# Altium PCB h_sensor_safety.PcbDoc
Units mil, origin at the board's own origin, x right, y up, seen from the top; angles counter-clockwise.
Board outline 2850 x 1885 mil, 2 copper layers (Top Layer, Bottom Layer); 19 components, 33 nets, 76 pads, 6 vias.
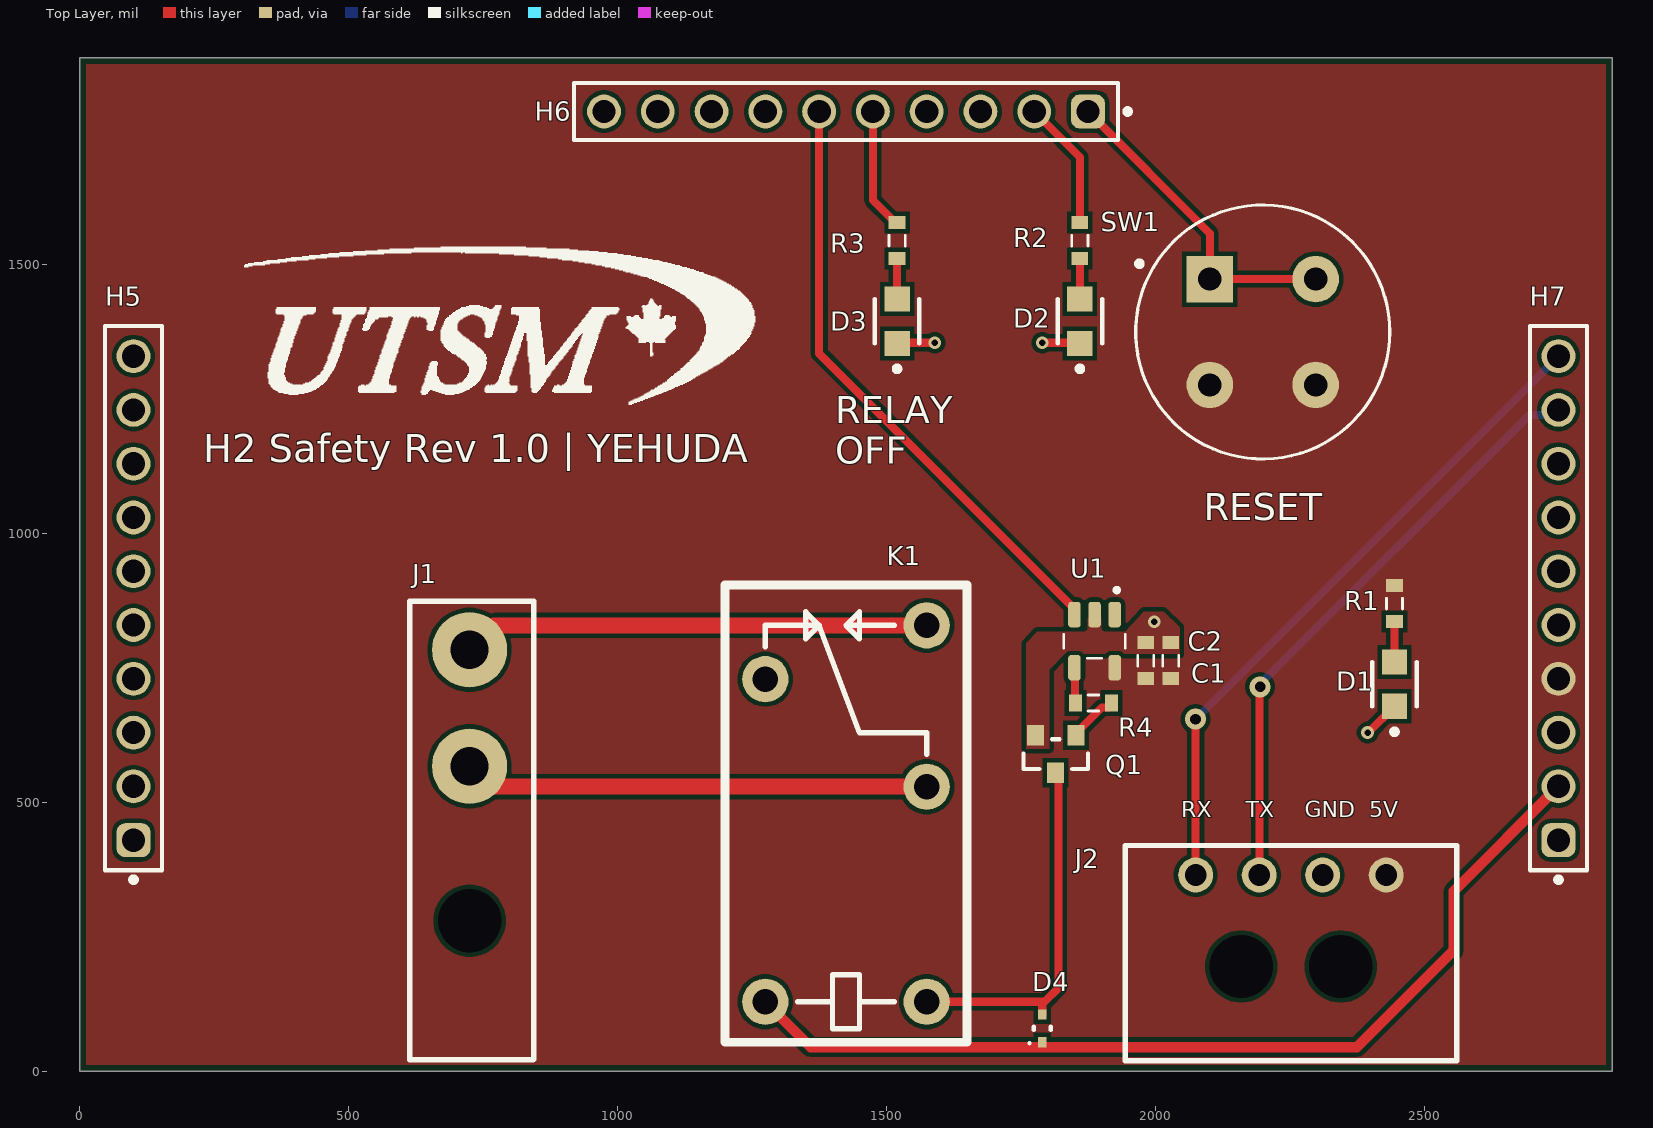
[diagram p0: Top Layer view]
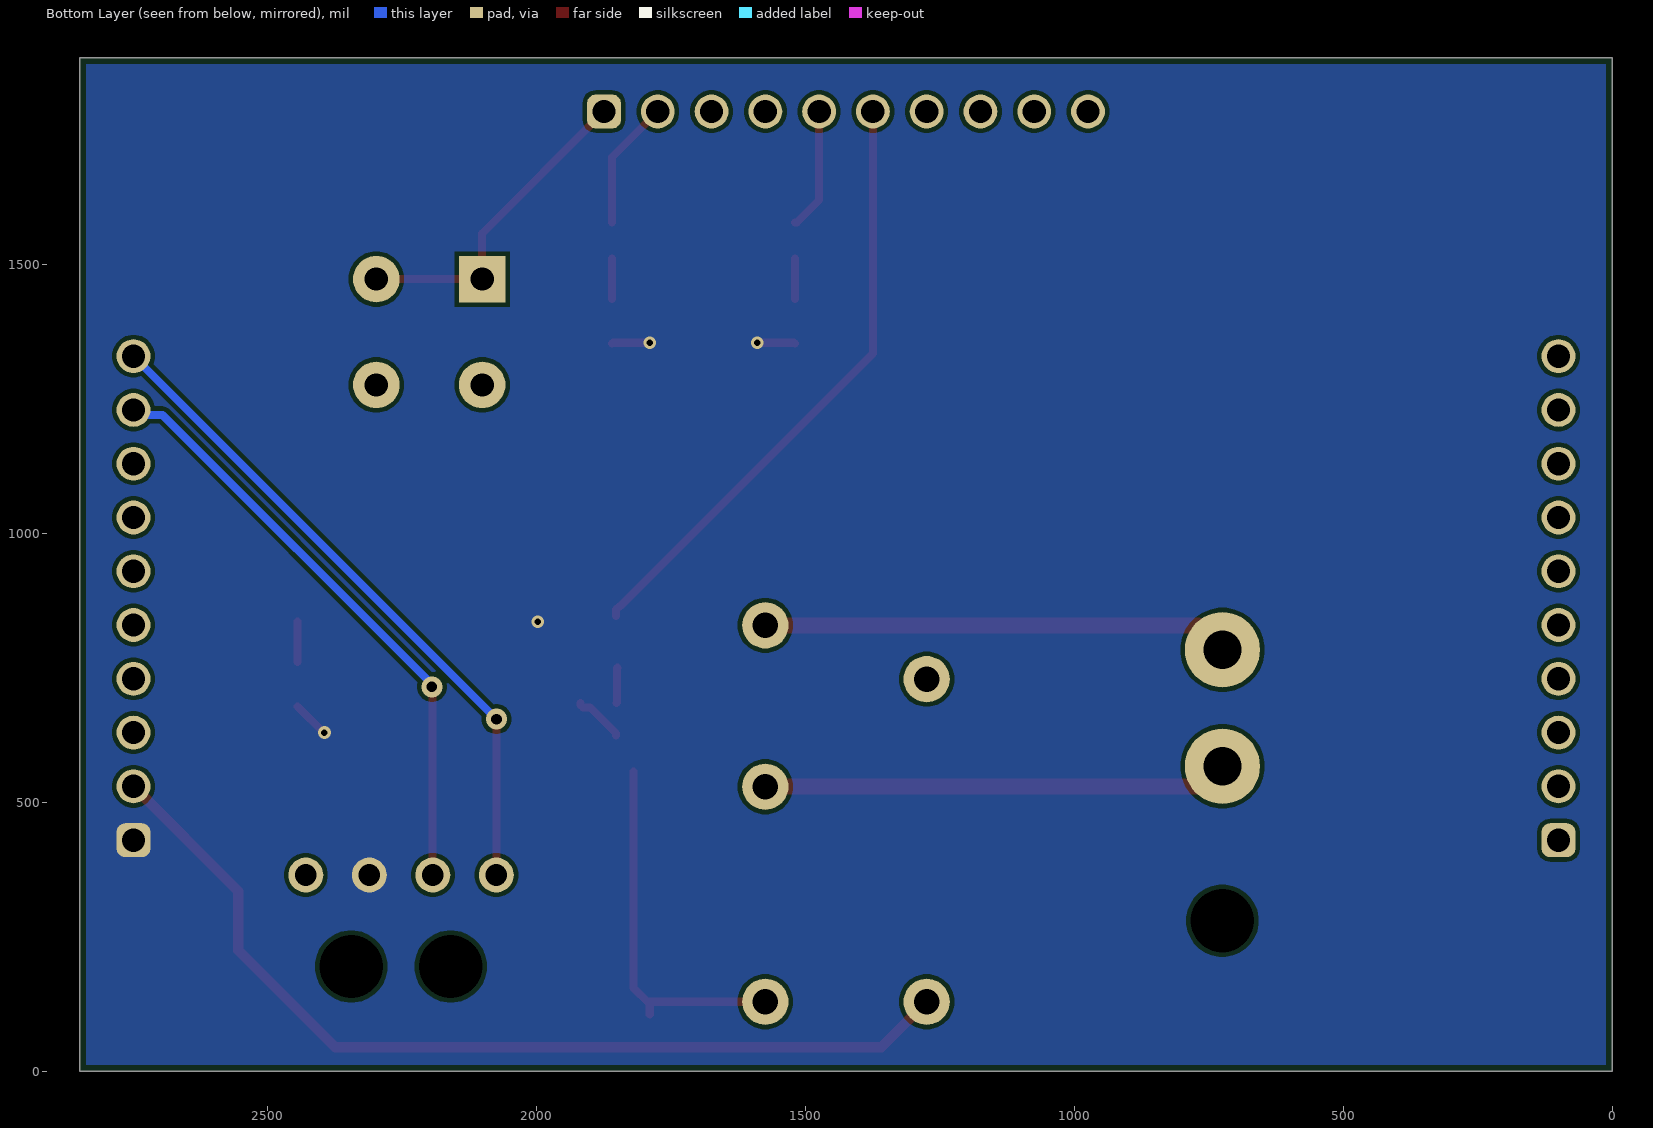
[diagram p1: Bottom Layer view, seen from below]
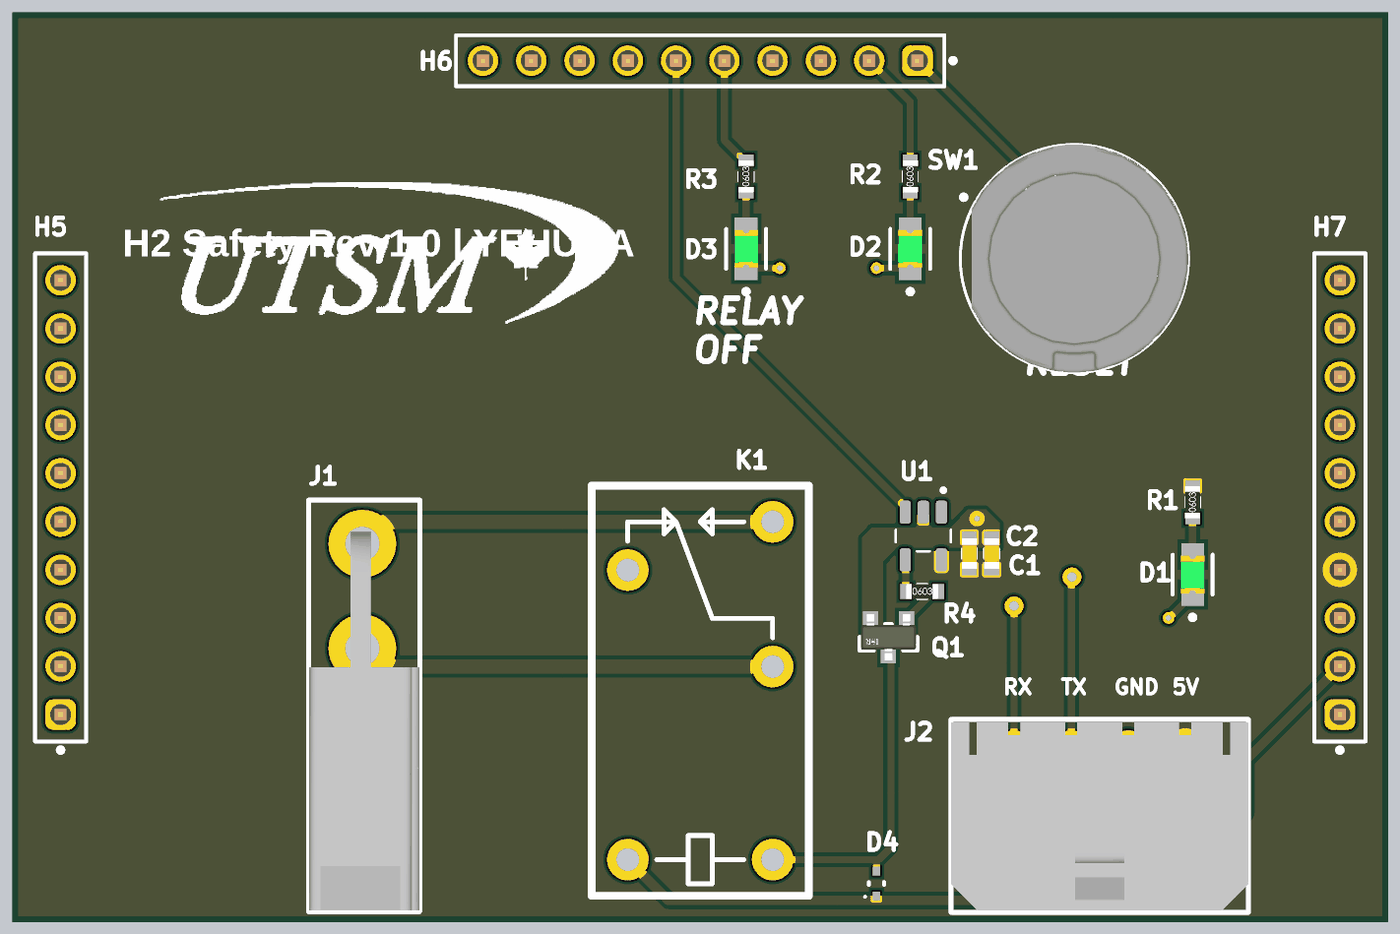
[diagram p2: 3D render of the assembled board from above, using the file's embedded part models]

## Layer stack, top to bottom
Top Solder: solder mask 0.4, Solder Resist, Dk 3.5
Top Layer: signal copper 1.4
Dielectric 1: dielectric 12.6, FR-4, Dk 4.8
Bottom Layer: signal copper 1.4
Bottom Solder: solder mask 0.4, Solder Resist, Dk 3.5

## Board outline
0,0 2850,0 2850,1885 0,1885

## Design rules (kind name [scope] priority, off if disabled: settings)
BoardOutlineClearance [All] p1: gap=11.81 ignorepadtopadclearanceinfootprint=FALSE except(15.75: Arc-SplitBarrior Arc-SplitContinuation Track-SplitBarrior Track-SplitContinuation SMDPad-SplitBarrior SMDPad-SplitContinuation THPad-SplitBarrior THPad-SplitContinuation Via-SplitBarrior Via-SplitContinuation Fill-SplitBarrior Fill-SplitContinuation Poly-SplitBarrior Poly-SplitContinuation Region-SplitBarrior Region-SplitContinuation Text-SplitBarrior Text-SplitContinuation)
Clearance "Clearance Different Nets" [All] p1: gap=7.87 ignorepadtopadclearanceinfootprint=FALSE except(3.5: Arc-Arc Arc-Track Arc-SMDPad Track-Track Track-SMDPad; 5: SMDPad-SMDPad SMDPad-Via THPad-Via Via-Via; 10: Arc-Via Arc-Text Track-Via Track-Text SMDPad-Text THPad-Text Via-Text Fill-Text Poly-Text Region-Text Text-Text; 19.68: THPad-THPad Via-Hole)
Clearance "Clearance Same Nets" [All] p2: gap=7.87 ignorepadtopadclearanceinfootprint=FALSE except(3.5: Arc-Arc Arc-Track Arc-SMDPad Track-Track Track-SMDPad SMDPad-SMDPad; 5: SMDPad-Via THPad-Via; 10: Arc-Via Arc-Text Track-Via Track-Text SMDPad-Text THPad-Text Via-Via Via-Text Fill-Text Poly-Text Region-Text Text-Text)
Clearance "Clearance Bottom Layer" [OnLayer('Bottom Layer')] p3: gap=8 ignorepadtopadclearanceinfootprint=TRUE except(10: Arc-Text Track-Text SMDPad-Text THPad-Text Via-Text Fill-Text Poly-Text Region-Text Text-Text)
Clearance "Clearance Top Layer" [OnLayer('Top Layer')] p4: gap=8 ignorepadtopadclearanceinfootprint=TRUE except(10: Arc-Text Track-Text SMDPad-Text THPad-Text Via-Text Fill-Text Poly-Text Region-Text Text-Text)
HoleSize [All] p1: absolutevalues=TRUE maxlimit=248.03 minlimit=7.87 maxpercent=80.000 minpercent=20.000
MinimumAnnularRing [All] p1: minimumring=5.12
MinimumSolderMaskSliver [All] p1: minsoldermaskwidth=3.94
PolygonConnect PolygonConnect_1 [All] p1: connectstyle=Direct reliefconductorwidth=20 reliefentries=4 polygonreliefangle="90 Angle" airgapwidth=10
RoutingCorners [All] p1: cornerstyle=Round minsetback=100 maxsetback=100
RoutingVias [All] p1: holewidth=19.68 width=39.37 viastyle="Through Hole" minholewidth=7.87 minwidth=13.78 maxholewidth=39.37 maxwidth=78.74
SilkToSilkClearance [All] p1: silktosilkclearance=3.94
SilkToSolderMaskClearance [IsPad] p1: minsilkscreentomaskgap=3.94 clearancetoexposedcopper=TRUE
SolderMaskExpansion [All] p1: expansion=4 istentingtop=FALSE
SupplyNets "Schematic Supply Nets_2" [InNet('+12')] p1: voltage=0.000
SupplyNets "Schematic Supply Nets_1" [InNet('GND')] p2: voltage=0.000
SupplyNets "Schematic Supply Nets" [InNet('+5')] p3: voltage=0.000
Width [All] p1: maxlimit=100 minlimit=3.5 preferedwidth=15
25 further rules are at their usual default settings.

## Components (designator, comment, footprint, x,y, rotation, side; value= is the part's Value field where it differs from the comment)
C1 "" 0603c 1982.55,763.76 r270 top value=1uF
C2 "" 0603c 2028.78,763.76 r270 top value=0.1uF
D1 "LTST-C171GKT" FP-LTST-C171GKT-MFG 2445,720 r90 top
D2 "LTST-C171GKT" FP-LTST-C171GKT-MFG 1860,1395 r90 top
D3 "LTST-C171GKT" FP-LTST-C171GKT-MFG 1520,1395 r90 top
D4 "RB521S30T1G" ONSC-SOD-523-2-502-01_V 1790,80 r90 top
H5 "" 61301011121 100,880 r90 top
H6 "" 61301011121 1425,1785 r180 top
H7 "" 61301011121 2750,880 r90 top
J1 "header 2 pos minifit right angle" "0039300020 minifit 2 pos" 725,567.4 r0 top
J2 "header 4 pos microfit right angle single row" "0436500401 MICROFIT 4 POS RIGHT ANGLE SINGLE ROW" 2252.48,195 r0 top
K1 "G5Q-1A4-DC12" G5Q-1A4-DC12 1575,129.4 r90 top
Q1 "IRLML6344TRPBF" FP-Micro3-MFG 1815,590 r270 top
R1 "Res3" 0603r 2445,870 r90 top value=300
R2 "Res3" 0603r 1860,1545 r90 top value=300
R3 "Res3" 0603r 1520,1545 r90 top value=300
R4 "Res3" 0603r 1885,685 r0 top value=10k
SW1 "D6R10F1LFS" FP-D6R10F1LFS-MFG 2200,1375 r0 top
U1 "UCC27519DBVR" SOT95P280X145-5N 1887.2,800 r270 top

## Footprints (in the part's own frame and the unit in brackets; to place one, negate y for a bottom-side part, rotate by r counter-clockwise, add the part's x,y. Pads: shape width x height; smd on the part's side, far side on the other; paste and mask are expansions set on the pad)
0603c [mil]
  rect 24x31 smd: 1(-33.5,0) 2(33.5,0)
  silkscreen extent -10,-15 10,15, body extent -31,-15 31,16, height 31
0603r [mil]
  rect 24x31 smd: 1(-33.5,0) 2(33.5,0)
  silkscreen extent -10,-15 10,15, body extent -33,-16 33,16, height 22
"0039300020 minifit 2 pos" [mil]
  round 80 hole 118.11 unplated: 0(0,-287.4)
  round 140 hole 71: 1(0,0) 2(0,216.54)
  silkscreen extent -111,-546 119,307, body extent -110,-543 118,241, height 449
"0436500401 MICROFIT 4 POS RIGHT ANGLE SINGLE ROW" [mm]
  round 2.54 hole 2.997 unplated: 0(-2.35,0) 0(2.35,0)
  round 1.651 hole 1.02: 1(1.5,4.32) 2(4.5,4.32) 3(-1.5,4.32) 4(-4.5,4.32)
  silkscreen extent -7.82,-4.44 7.83,5.71, body extent -7.82,-4.34 7.82,5.56, height 6.13
61301011121 [mm] "Pin Header, pitch 2.54 mm, THT, Vertical, single row, 10p"
  rrect50% 1.6x1.6 hole 1.1: 1(-11.43,0)
  round 1.6 hole 1.1: 2(-8.89,0) 3(-6.35,0) 4(-3.81,0) 5(-1.27,0) 6(1.27,0) 7(3.81,0) 8(6.35,0) 9(8.89,0) 10(11.43,0)
  silkscreen extent -13.42,-1.34 12.85,1.34, body extent -12.7,-1.27 12.7,1.27, height 8.57
FP-D6R10F1LFS-MFG [mm]
  rect 2.2x2.2 hole 1.1 paste-2539.97 mask+0: 1(-2.5,2.5)
  round 2.2 hole 1.1 paste-2539.97 mask+0: 2(2.5,2.5) 3(-2.5,-2.5) 4(2.5,-2.5)
  silkscreen extent -6,-6 6,6, body extent -6.1,-6.1 6.1,6.1, height 0.25
FP-LTST-C171GKT-MFG [mm]
  rect 1.2x1.2 smd paste+0 mask+0: 1(-1.05,0) 2(1.05,0)
  silkscreen extent -2.37,-1.05 1.05,1.05, body extent -1.75,-0.77 1.75,0.77, height 0.25
FP-Micro3-MFG [mm]
  rect 0.972x0.802 smd paste+0 mask+0: 1(-0.885,0.95) 2(-0.885,-0.95) 3(0.885,0)
  silkscreen extent -0.7,-1.52 0.7,1.52, body extent -1.47,-1.87 1.47,1.87, height 0.25
G5Q-1A4-DC12 [mil]
  round 86 hole 47.24: P1(0,0) P2(400,0) P3(700,0) P4(600,300) P5(0,300)
  silkscreen extent -75,-75 775,375
ONSC-SOD-523-2-502-01_V [mm] "SOD, 2-Leads, Body 1.2x0.8mm"
  rect 0.48x0.4 smd: 1(-0.66,0) 2(0.66,0)
  silkscreen extent -0.75,-0.4 0.07,0.65, body extent -0.6,-0.4 0.6,0.4, height 0.7
SOT95P280X145-5N [mm]
  rrect50% 1.21x0.59 smd: 1(-1.255,0.95) 2(-1.255,0) 3(-1.255,-0.95) 4(1.255,-0.95) 5(1.255,0.95)
  silkscreen extent -2.51,-1.45 0.8,1.45

## Part data
C1 C2: library part Cap, "0603 Capacitor", LatestRevisionDate=17-Jul-2002, LatestRevisionNote="Re-released for DXP Platform.", PackageDescription="Radial Cap, Thru-Hole; 2 Leads; 0.3 in Pin Spacing", PackageReference=RAD-0.3, Published=8-Jun-2000, Publisher="Altium Limited"
D1 D2 D3: library part CMP-22017-000007-1, "LED GREEN CLEAR CHIP SMD", Case Code (Imperial)=0805, Case Code (Metric)=2012, Color=Green, Forward Current=30mA, Forward Voltage=2.1V, Lens Color=Colorless, Max Operating Temperature=85°C, Min Operating Temperature=-55°C, Package Quantity=1, Power Dissipation=100mW, Reverse Voltage=5V, Test Current=10mA, Case/Package=0805, Depth=1.25mm, Dominant Wavelength=569nm, Height=0.8mm, Illumination Color=Green, Lead Free="Lead Free", Length=2mm, Lens Style=Diffused, Lens Transparency=Clear, Luminous Intensity=12mcd, Mount="Surface Mount", Number of Elements=1, Number of LEDs=1, Number of Pins=2, Packaging="Tape and Reel", Power Rating=100mW, Radiation Hardening=No, Viewing Angle=130°, Wavelength=585nm, Width=1.25mm
D4: library part CMP-1051-00018-1, "Schottky Barrier Diode, 2-Pin SOD-523, Pb-Free, Tape and Reel", Manufacturer="On Semiconductor", ComponentLink1Description="Manufacturer URL", ComponentLink1URL=http://www.onsemi.com/, ComponentLink2Description=Datasheet, ComponentLink2URL=http://www.onsemi.cn/pub_link/Collateral/RB521S30T1-D.PDF, ComponentLink3Description="Package Specification", ComponentLink3URL=http://www.onsemi.com/pub_link/Collateral/502-01.PDF, Configuration=Single, DatasheetVersion="Rev. 8", IFSM Max (A)=1, Mounting Technology="Surface Mount", PackageDescription="2-Pin SOD, Body 1.2 x 0.8 mm", PackageReference=SOD-523-2-502-01, PackageVersion="Rev. E, 09/2010", Packing="Tape and Reel", PartNumber=RB521S30T1G, RoHS=TRUE
H5 H6 H7: library part 61301011121, "WR-PHD Pin Header, THT, Vertical, pitch 2.54mm, 1 Row, 10P", Contact Resistance=20mOhm, Manufacturer="Wurth Elektronik", Operating Temperature Max=105°C, Operating Temperature Min=-40°C, Rated Current=3A, Withstanding Voltage=500V, Working Voltage=250V, Category="Board-to-Board Connectors", ComponentLink1Description="Website Link", ComponentLink1URL=https://www.we-online.com/redexpert/article/61301011121?ad, ComponentLink2Description="Datasheet Link", ComponentLink2URL=https://www.we-online.com/redexpert/spec/61301011121?ad, Gender="Pin Header", Manufacturer Part Number=61301011121, Match Code=WR-PHD, Mount="Through Hole", Number of Pins=10, Number of Rows=1, Orientation=Vertical, Packaging=Bag, Pitch=2.54mm
J1: Supplier Part Number 1=WM21351-ND, Supplier 1=Digi-Key, Supplier 2=Digi-Key, Supplier Part Number 2=WM16570-ND
J2: Supplier Part Number 1=WM1865-ND, Supplier 1=Digi-Key
K1: "General Purpose Relay Ã¢â‚¬Â¢ Coil Voltage: 12 VDC Ã¢â‚¬Â¢ Contact Configuration: 1A SPST-NO Ã¢â‚¬Â¢ Current : 10 Amps Ã¢â‚¬Â¢ Mounting : PC Board Ã¢â‚¬Â¢ Operating Function: Single Side Stable", Package=None, Check_prices=https://www.snapeda.com/parts/G5Q-1A4-DC12/Omron+Electronics+Inc-EMC+Div/view-part/?ref=eda, MF="Omron Electronics", MP=G5Q-1A4-DC12, SnapEDA_Link=https://www.snapeda.com/parts/G5Q-1A4-DC12/Omron+Electronics+Inc-EMC+Div/view-part/?ref=snap
Q1: library part CMP-32901-000110-1, "MOSFET N-CH 30V 2.7A SOT-23-3", Continuous Drain Current=2.7A, Drain To Source Breakdown Voltage=30V, Drain To Source Resistance=123mΩ, Gate To Source Voltage=20V, Input Capacitace At Vds="110pF @ 15V", Manufacturer=Infineon, Manufacturer Part Number=IRLML2030TRPBF, Max Forward Diode Voltage=1V, Max Junction Temp=+150°C, Package=Micro3, Power Dissipation=1.3W, Pulse Drain Current=11A, Temperature="-55°C to +150°C", Temperature Range Low=-55°C, Automotive=No, Category=Trans, ComponentLink2Description=Datasheet, ComponentLink2URL=https://www.infineon.com/dgdl/irlml2030pbf.pdf?fileId=5546d462533600a401535664aef525ec, Depletion Mode=False, Device Class L1="Discrete Semiconductors", Device Class L2=Transistors, Device Class L3=MOSFETs, Digikey Description="MOSFET N-CH 30V 2.7A SOT-23-3", Drain To Source Voltage=30V, Footprint Url=http://www.irf.com/package/outline/po_micro3.pdf, Gate Charge At Vgs="1nC @ 4.5V", Height=1.12mm, Ipc Land Pattern Name=SOT95P237X100-3, Lead Free=Yes, Number Of Channels=1, Number Of N Channels=1, Octopart=https://octopart.com/irlml2030trpbf-infineon-65874966, Reverse Recovery Charge=0.3nC, Reverse Recovery Time=9ns, RoHS=TRUE, Rthja Max=100°C/W, Standoff Height=0.01mm, Temperature Range High=+150°C, Threshold Vgs Max=2.3V, Threshold Vgs Min=1.3V, Turn Off Delay Time=4.5ns, Turn On Delay Time=4.1ns
R1 R2 R3 R4: "SMD Resistor", LatestRevisionDate=29-May-2009, LatestRevisionNote="IPC-7351 Footprint Added.", PackageDescription="Chip Resistor", PackageReference=J1-0603, Published=8-Jun-2000, Publisher="Altium Limited"
SW1: library part CMP-10035-000004-1, "SWITCH PUSH SPST-NO 0.1A 32V", Actuator Color=Grey, Current Rating=100mA, Max Operating Temperature=85°C, Max Voltage Rating (DC)=32V, Min Operating Temperature=-20°C, Operating Force=1.3N, Package Quantity=2500, Power Rating=3W, Actuator Length=7mm, Actuator Type="Round, Button", Color=Grey, Contact Plating=Silver, Diameter=12mm, Electrical Life=250000Cycles, Lead Free="Lead Free", Max Current Rating=100mA, Mount="Through Hole", Number of Pins=4, Number of Terminals/Pins=4, Orientation=Straight, Packaging=Bulk, RoHS Compliant=No, Row Spacing=5mm, Series=D6, Switch Function=Off-Mom, Terminal Pitch=5mm, Termination="PC Pin", Throw Configuration=SPST, Voltage Rating (DC)=32V
U1: "Low side gate driver", Alternate_PartNumber=UCC27519DBVT, Manufacturer="Texas Instruments", CompType=IC, Copyright="Copyright (C) 2023 Ultra Librarian. All rights reserved.", Manufacturer_Part_Number=UCC27519DBVR, Mfr_Name="Texas Instruments", MountType=SMT, PackageReference=DBV0005A, PartNumber=UCC27519DBVR, RefDes=RefDes, RoHS=Y, Type=DEV

## Via types
v1: diameter 24, hole 12, Top Layer to Bottom Layer, 4 vias
v2: diameter 39.37, hole 19.68, Top Layer to Bottom Layer, 2 vias

## Nets (pads, with @x,y where several pads share a name; then routed paths per layer and width w, separated by ;. In a path a pad name is that pad's centre, name@x,y a point inside that pad or via, vN(x,y) a via of type N, cw(c..) or ccw(c..) an arc to the next point about the centre after c; other vN are vias at no path point)
+5: C1.2 C2.2 H7.4 J2.2 R1.2 SW1.3 SW1.4 U1.5
+12: D4.1 H7.2 K1.P5 | length 1775.3
  Top Layer w20: K1.P5 1359.4,45 1790,45 2375,45 2555,225 2555,335 H7.2
BAT_IN: J1.1 K1.P2 | length 899.6
  Top Layer w30: J1.1@758.82,567.4 J1.1 763,529.4 K1.P2
D0/RX: H7.10 J2.4 | length 1244
  Top Layer w15: v2@2075.16,654.84 2075.16,365.23 J2.4
  Bottom Layer w15: v2@2075.31,655.31 H7.10
  other v2: 2075,655
D1/TX: H7.9 J2.3 | length 1121.8
  Top Layer w15: J2.3 2194.21,365.87 2194.21,714.21 v2(2195,715)
  Bottom Layer w15: v2(2195,715) 2195,720 2695.82,1220.82 2740.82,1220.82 H7.9
D3/RESET: H6.1 SW1.1 SW1.2 | length 616.2
  Top Layer w15: H6.1 2101.57,1558.43 SW1.1 ; SW1.1@2081.57,1473.43 SW1.1 ; SW1.2@2292.38,1473.43 SW1.1
D4/RESETTING_IND: H6.2 R2.2 | length 241.7
  Top Layer w15: H6.2 1860,1700 R2.2
D7/RELAY_OFF: H6.5 R3.2 | length 227.2
  Top Layer w15: H6.5 1475,1620 1516.5,1578.5 R3.2
D8/RELAY: H6.6 U1.3 | length 1136.5
  Top Layer w15: H6.6 1375,1335.03 1844.3,865.73 1845.68,865.73 1852.78,858.63 U1.3@1852.78,847.22
GND: C1.1 C2.1 D1.1 D2.1 D3.1 H7.1 J2.1 Q1.2 U1.2 | length 211.3
  Top Layer w15: D3.1 1521.34,1355 v1(1590,1355) ; v1(1790,1355) 1858.66,1355 D2.1 ; v1(2395,630) 2396.34,630 D1.1
  other v1: 1998.28,836.2
NetD1_2: D1.2 R1.1 | length 75.2
  Top Layer w15: D1.2 R1.1
NetD2_2: D2.2 R2.1 | length 75.2
  Top Layer w15: D2.2 R2.1
NetD3_2: D3.2 R3.1 | length 75.2
  Top Layer w15: D3.2 R3.1
NetD4_2: D4.2 K1.P1 Q1.3 | length 676.4
  Top Layer w15: K1.P1 1785,129.4 1794.4,129.4 1820,155 Q1.3@1820,557.35 ; D4.2 1790,124.4
NetH5_1: H5.1
NetH5_2: H5.2
NetH5_3: H5.3
NetH5_4: H5.4
NetH5_5: H5.5
NetH5_6: H5.6
NetH5_7: H5.7
NetH5_8: H5.8
NetH5_9: H5.9
NetH6_3: H6.3
NetH6_4: H6.4
NetH6_7: H6.7
NetH6_8: H6.8
NetH6_9: H6.9
NetH6_10: H6.10
NetH7_3: H7.3
NetQ1_1: Q1.1 R4.2 | length 95
  Top Layer w15: Q1.1 1852.4,628.19 1901.21,677 1914,677 1918.5,681.5 R4.2
NetR4_1: R4.1 U1.4 | length 66.3
  Top Layer w15: U1.4 1850.65,749.74 1850.65,685.85 R4.1
SOL_OUT: J1.2 K1.P3 | length 892.5
  Top Layer w30: J1.2@748.62,783.94 J1.2 770.46,829.4 K1.P3
pads on no net: H5.10 H7.5 H7.6 H7.7 H7.8 J1.0 J2.0 K1.P4 U1.1

## Polygon pours and split planes (outlines as drawn)
+5 on Top Layer "+5_L01_P015" (solid, pour order 15): 0,1885 0,0 2850,0 2850,1885
GND on Top Layer "GND_L01_P000" (solid, pour order 0): 1803.37,746.46 1803.37,600 1760,600 1760,796.23 1780.31,817.64 1869.09,817.64 1874.4,822.28 1874.4,844.02 1900,844.02 1900,822.28 1905.31,817.64 1943.89,817.64 1978.85,855 2016.28,855 2045.36,825.92 2045.36,776.22 1831.68,776.22
GND on Bottom Layer "gnd" (solid, pour order 17): 0,1885 0,0 2850,0 2850,1885

## Silkscreen, mask and mechanical layers (free items; w line width, h text height)
Top Overlay:
  drawing of 6 lines, arcs and shapes, not listed
  text "RELAY / OFF" at 1405,1130 h50
  text "H2 Safety Rev 1.0 | YEHUDA" at 230,1115 h90
  text "RESET" at 2090,1025 h50
  text "RX" at 2048,473 h30
  text "TX" at 2168,473 h30
  text "GND" at 2278,473 h30
  text "5V" at 2398,473 h30
Mechanical 1:
  the board outline again, w10